# Altium PCB ESCv5.PcbDoc
Units mm, origin at the board's own origin, x right, y up, seen from the top; angles counter-clockwise.
Board outline 42.42 x 32.89 mm, 2 copper layers (Top Layer, Bottom Layer); 60 components, 40 nets, 182 pads, 0 vias.
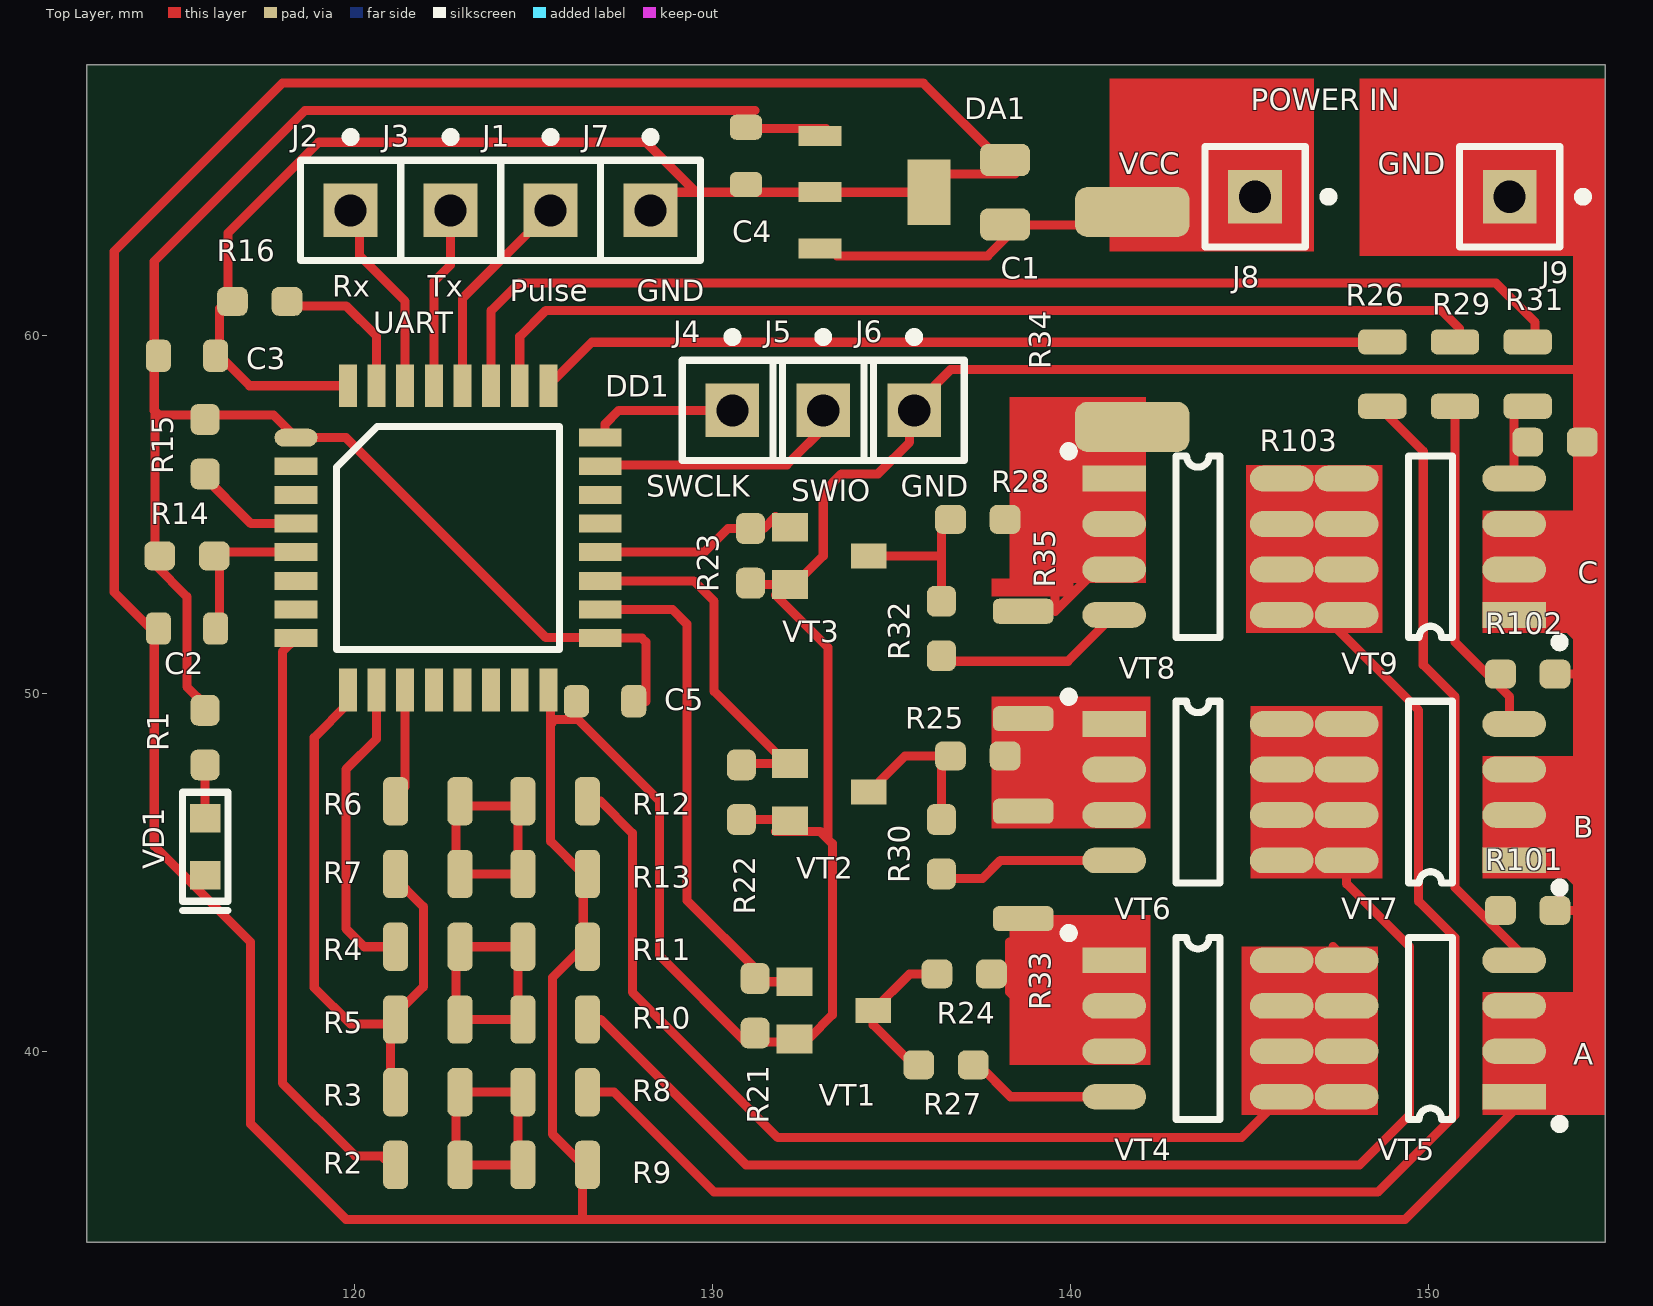
[diagram p0: Top Layer view]
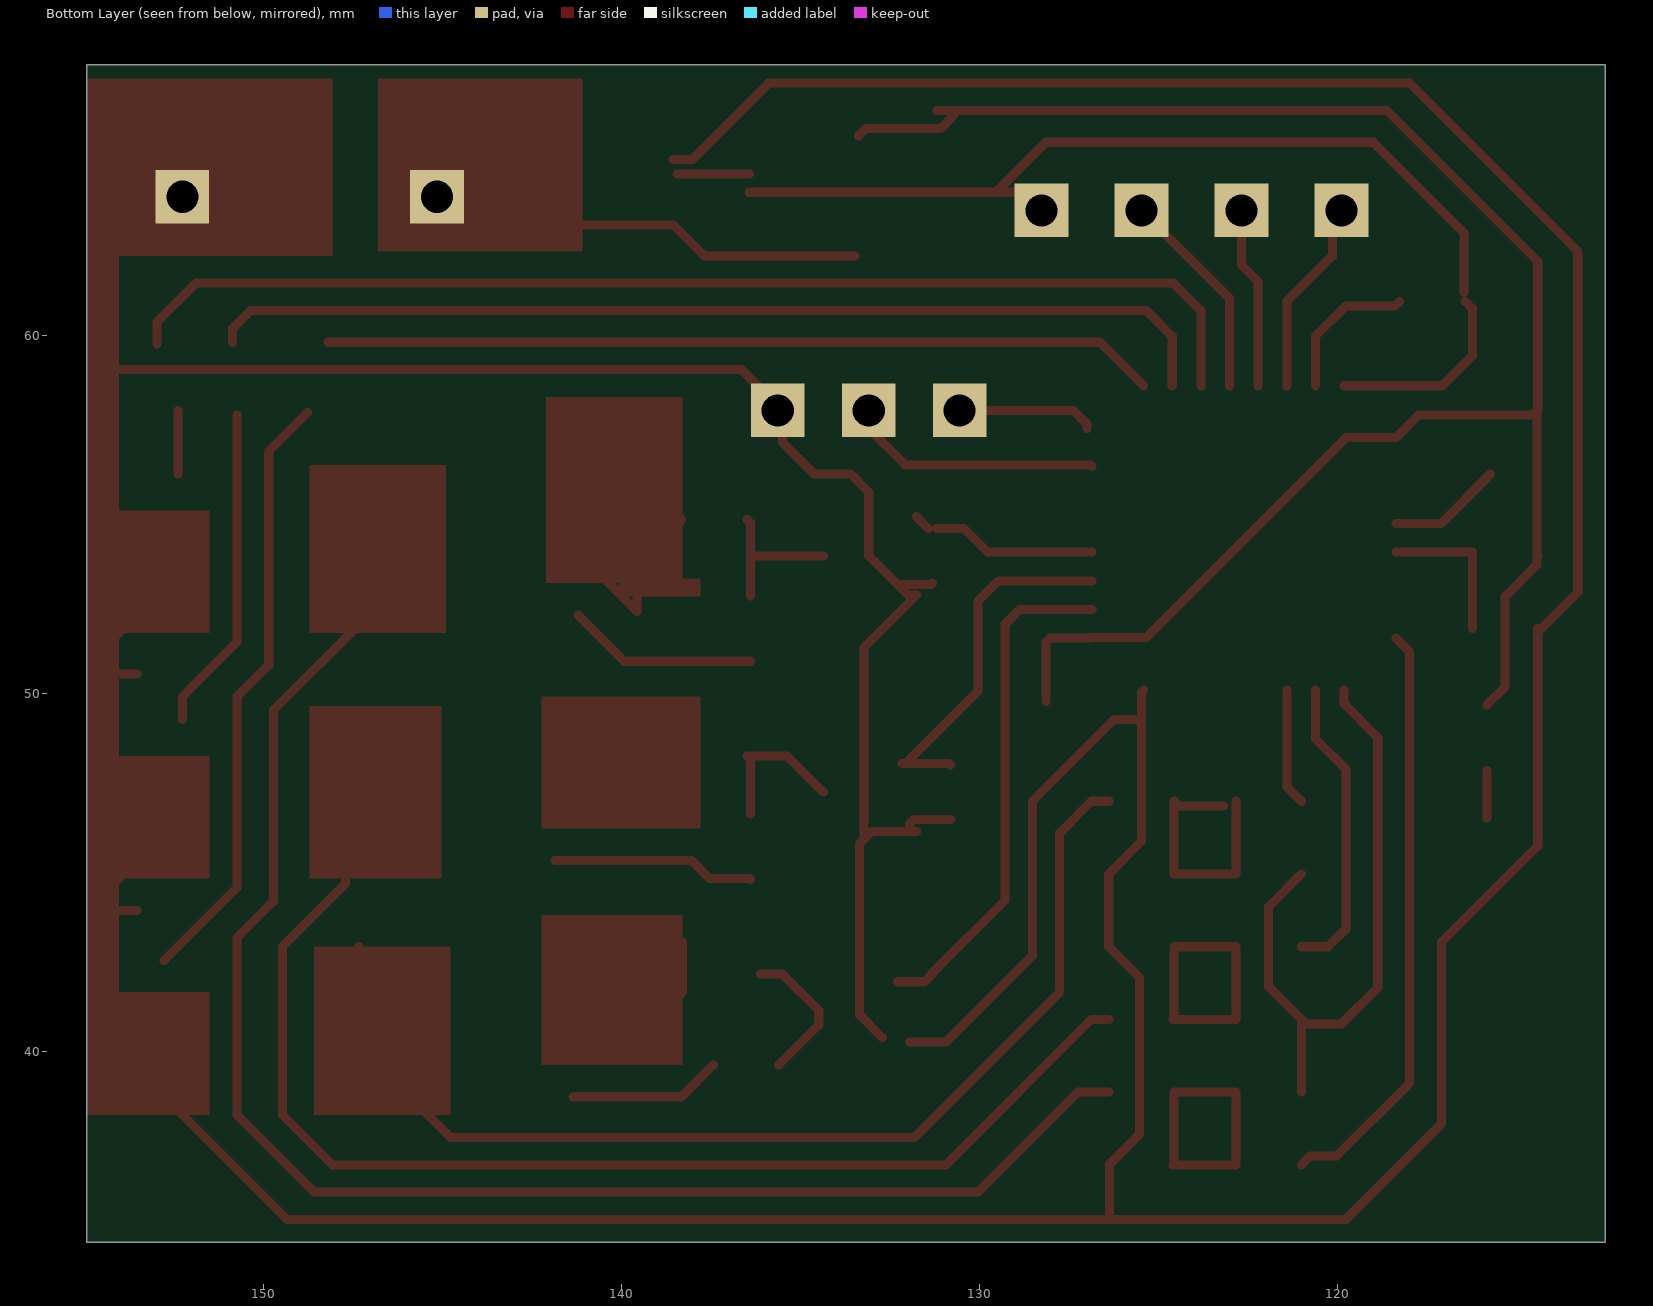
[diagram p1: Bottom Layer view, seen from below]
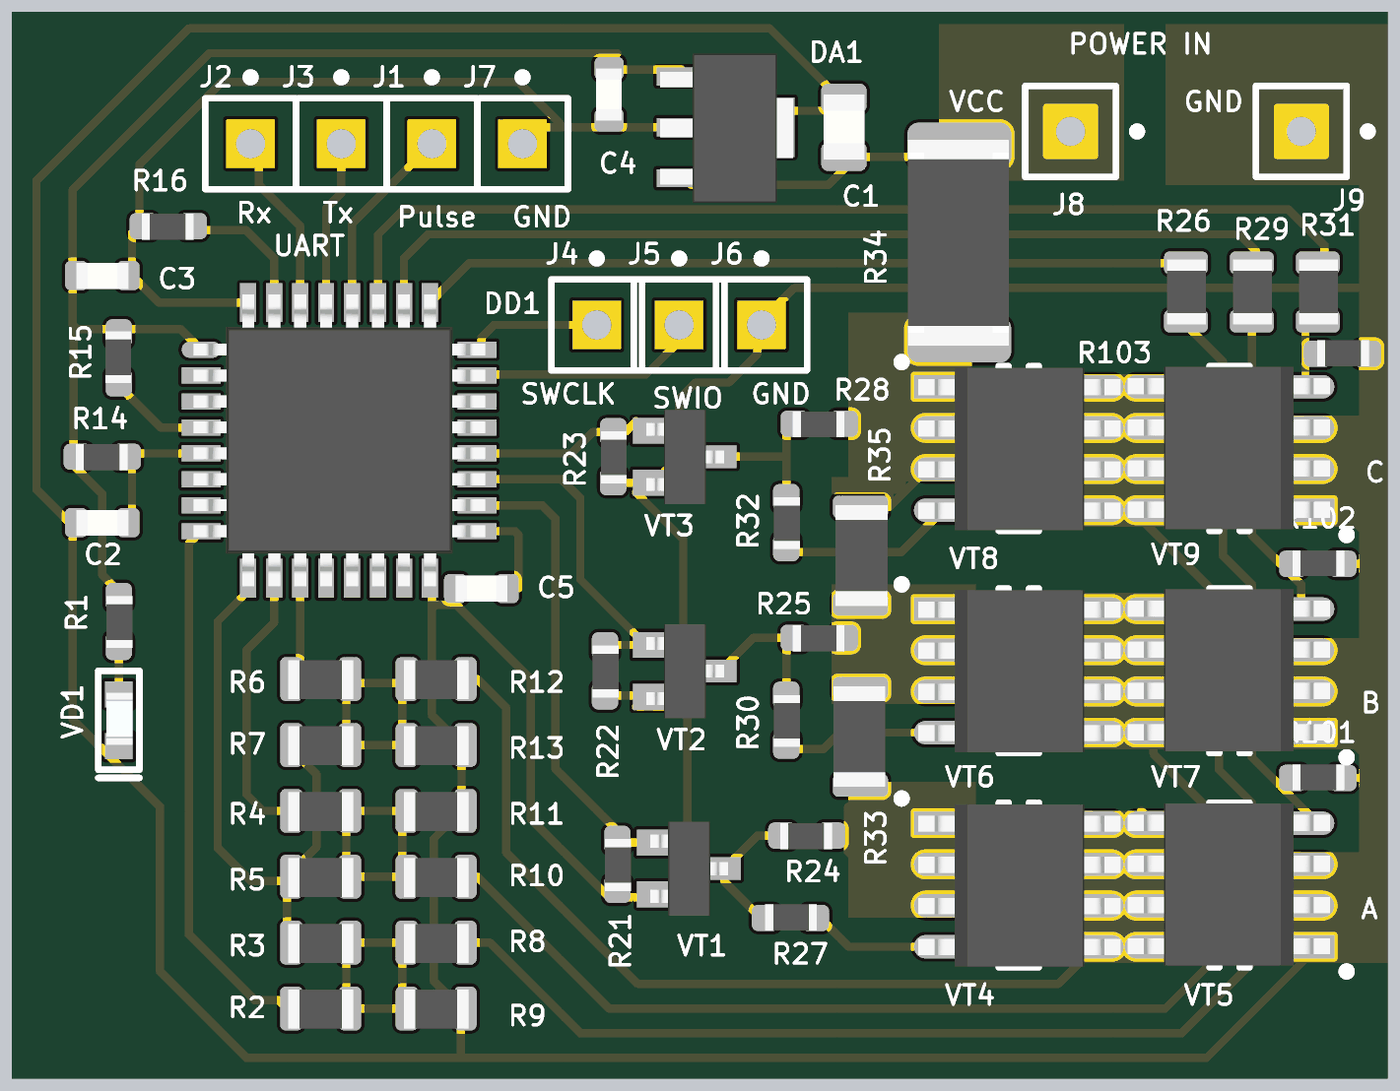
[diagram p2: 3D render of the assembled board from above, using the file's embedded part models]

## Layer stack, top to bottom
Top Solder: solder mask 0.0102, Solder Resist, Dk 3.5
Top Layer: signal copper 0.0356
Dielectric1: dielectric 0.32, FR-4, Dk 4.8
Bottom Layer: signal copper 0.0356
Bottom Solder: solder mask 0.0102, Solder Resist, Dk 3.5

## Board outline
112.522,34.671 112.522,67.564 154.94,67.564 154.94,34.671

## Design rules (kind name [scope] priority, off if disabled: settings)
Clearance [All] p1: gap=0.254
ComponentClearance [All] p1 off: gap=0.254 collisioncheckmode=3 verticalgap=0.254 showdistances=FALSE
FabricationTestPointUsage TestPointUsage [All] p1: valid=0 allowmultiple=FALSE
FabricationTestpoint Testpoint [All] p1: side=3 testpointundercomponent=TRUE minsize=1.016 maxsize=2.54 preferedsize=1.524 minholesize=0 maxholesize=1.016 preferedholesize=0.813 testpointgrid=0.025 allowsidetop=TRUE allowsidebottom=TRUE usegrid=TRUE gridtolerance=0
MinimumSolderMaskSliver [All] p1: minsoldermaskwidth=0.05
PolygonConnect [All] p1: connectstyle=Relief reliefconductorwidth=0.254 reliefentries=4 polygonreliefangle="90 Angle" airgapwidth=0.254
RoomDefinition ESC [InComponentClass('ESC')] p1: confinementstyle=ConfineIn formatcopy=TRUE lockcomponents=FALSE outline 112.395,34.671 155.067,34.671 155.067,67.564 112.395,67.564
RoutingVias [All] p1: holewidth=0.711 width=1.27 viastyle="Through Hole" minholewidth=0.711 minwidth=1.27 maxholewidth=0.711 maxwidth=1.27
SilkToSolderMaskClearance SilkscreenOverComponentPads [IsPad] p1 off: minsilkscreentomaskgap=0.254 clearancetoexposedcopper=TRUE
SolderMaskExpansion [All] p1: expansion=0.102
Width [All] p1: maxlimit=0.254 minlimit=0.254 preferedwidth=0.254
25 further rules are at their usual default settings.

## Components (designator, comment, footprint, x,y, rotation, side; value= is the part's Value field where it differs from the comment)
C1 "1uF" CAP0805 138.176,64.008 r90 top
C2 "0.1uF" CAP0603 115.316,51.816 r0 top
C3 "0.1uF" CAP0603 115.316,59.436 r0 top
C4 "0.1uF" CAP0603 130.937,65.024 r270 top
C5 "0.1uF" CAP0603 127,49.784 r0 top
DA1 "L78L33??" SOT89 133.604,64.008 r270 top
DD1 "STM32F051K8T" LQFP32-STM32 118.364,57.15 r0 top
J1 "Socket" PIN1 125.476,63.5 r0 top
J2 "Socket" PIN1 119.888,63.5 r0 top
J3 "Socket" PIN1 122.682,63.5 r0 top
J4 "Socket" PIN1 130.556,57.912 r0 top
J5 "Socket" PIN1 133.096,57.912 r0 top
J6 "Socket" PIN1 135.636,57.912 r0 top
J7 "Socket" PIN1 128.27,63.5 r0 top
J8 "Socket" PIN1 145.161,63.881 r270 top
J9 "Socket" PIN1 152.273,63.881 r270 top
R1 "1k" RES0603 115.824,48.768 r270 top
R2 "33k" RES0805 122.047,36.83 r180 top
R3 "33k" RES0805 122.047,38.862 r180 top
R4 "33k" RES0805 122.047,42.926 r180 top
R5 "33k" RES0805 122.047,40.894 r180 top
R6 "33k" RES0805 122.047,46.99 r180 top
R7 "33k" RES0805 122.047,44.958 r180 top
R8 "33k" RES0805 125.603,38.862 r180 top
R9 "12k" RES0805 125.603,36.83 r180 top
R10 "33k" RES0805 125.603,40.894 r180 top
R11 "12k" RES0805 125.603,42.926 r180 top
R12 "33k" RES0805 125.603,46.99 r180 top
R13 "12k" RES0805 125.603,44.958 r180 top
R14 "0" RES0603 115.316,53.848 r180 top
R15 "10k" RES0603 115.824,56.896 r90 top
R16 "10k" RES0603 117.348,60.96 r180 top
R21 "10k" RES0603 131.191,41.275 r270 top
R22 "10k" RES0603 130.81,47.244 r270 top
R23 "10k" RES0603 131.064,53.848 r270 top
R24 "2k" RES0603 137.033,42.164 r180 top
R25 "2k" RES0603 137.414,48.26 r180 top
R26 "100" RES0805 148.717,58.928 r270 top
R27 "100" RES0603 136.525,39.624 r0 top
R28 "2k" RES0603 137.414,54.864 r180 top
R29 "100" RES0805 150.749,58.928 r270 top
R30 "100" RES0603 136.398,45.72 r270 top
R31 "100" RES0805 152.781,58.928 r270 top
R32 "100" RES0603 136.398,51.816 r270 top
R33 "0" RES1206 138.684,45.212 r90 top
R34 "0" RES2512 141.732,60.452 r90 top
R35 "0" RES1206 138.684,50.8 r270 top
R101 "10k" RES0603 152.781,43.942 r0 top
R102 "10k" RES0603 152.781,50.546 r0 top
R103 "10k" RES0603 153.543,57.023 r0 top
VD1 "KP-1608SURC" "DIODE 1608" 115.824,45.72 r90 top
VT1 "BC817-25" SOT23 134.493,41.148 r270 top
VT2 "BC817-25" SOT23 134.366,47.244 r270 top
VT3 "BC817-25" SOT23 134.366,53.848 r270 top
VT4 "IRF9310PbF" "SO-8 IRF..." 141.224,42.545 r0 top
VT5 "IRF8736PbF" "SO-8 IRF..." 152.4,38.735 r180 top
VT6 "IRF9310PbF" "SO-8 IRF..." 141.224,49.149 r0 top
VT7 "IRF8736PbF" "SO-8 IRF..." 152.4,45.339 r180 top
VT8 "IRF9310PbF" "SO-8 IRF..." 141.224,56.007 r0 top
VT9 "IRF8736PbF" "SO-8 IRF..." 152.4,52.197 r180 top

## Footprints (in the part's own frame and the unit in brackets; to place one, negate y for a bottom-side part, rotate by r counter-clockwise, add the part's x,y. Pads: shape width x height; smd on the part's side, far side on the other; paste and mask are expansions set on the pad)
CAP0603 [mm]
  rrect50% 0.7x0.9 smd: 1(-0.8,0) 2(0.8,0)
  body extent -0.8,-0.41 0.8,0.39, height 0.9
CAP0805 [mm]
  rrect50% 0.9x1.4 smd: 1(-0.9,0) 2(0.9,0)
  body extent -0.99,-0.63 1.01,0.62, height 1.3
"DIODE 1608" [mm]
  rect 0.8x0.85 smd: 1(-0.8,0) 2(0.8,0)
  silkscreen extent -1.78,-0.64 1.52,0.64, body extent -0.77,-0.42 0.85,0.38, height 1.1
LQFP32-STM32 [mm] "STM32L052"
  oval 1.2x0.5 smd: 1(0,0)
  rect 1.2x0.5 smd: 2(0,-0.8) 3(0,-1.6) 4(0,-2.4) 5(0,-3.2) 6(0,-4) 7(0,-4.8) 8(0,-5.6) 17(8.5,-5.6) 18(8.5,-4.8) 19(8.5,-4) 20(8.5,-3.2) 21(8.5,-2.4) 22(8.5,-1.6) 23(8.5,-0.8) 24(8.5,0)
  rect 0.5x1.2 smd: 9(1.45,-7.05) 10(2.25,-7.05) 11(3.05,-7.05) 12(3.85,-7.05) 13(4.65,-7.05) 14(5.45,-7.05) 15(6.25,-7.05) 16(7.05,-7.05) 25(7.05,1.45) 26(6.25,1.45) 27(5.45,1.45) 28(4.65,1.45) 29(3.85,1.45) 30(3.05,1.45) 31(2.25,1.45) 32(1.45,1.45)
  silkscreen extent 1.13,-5.92 7.37,0.32, body extent -0.24,-7.3 8.76,1.7, height 1.6
PIN1 [mm] "Connector; Plug"
  rect 1.5x1.5 hole 0.9: 1(0,0)
  silkscreen extent -1.4,-1.4 1.4,2.17
RES0603 [mm]
  rrect50% 0.86x0.81 smd: 1(-0.762,0) 2(0.762,0)
  body extent -0.78,-0.38 0.82,0.42, height 0.45
RES0805 [mm]
  rrect50% 0.7x1.35 smd: 1(-0.9,0) 2(0.9,0)
  body extent -1,-0.58 1,0.62, height 0.5
RES1206 [mm]
  rrect50% 0.7x1.7 smd: 1(-1.5,0) 2(1.5,0)
  body extent -1.55,-0.76 1.55,0.84, height 0.55
RES2512 [mm]
  rrect50% 1.4x3.2 smd: 1(-3,0) 2(3,0)
  body extent -3.17,-1.52 3.18,1.58, height 0.55
"SO-8 IRF..." [mm]
  rect 1.78x0.72 smd: 1(0,0)
  oval 1.78x0.72 smd: 2(0,-1.27) 3(0,-2.54) 4(0,-3.81) 5(4.68,-3.81) 6(4.68,-2.54) 7(4.68,-1.27) 8(4.68,0)
  silkscreen extent -1.4,-4.44 2.96,0.89, body extent -0.75,-4.42 5.48,0.58, height 1.75
SOT23 [mm]
  rect 0.8x1 smd: 1(-0.8,-2.2) 2(0.8,-2.2)
  rect 0.7x1 smd: 3(0,0)
  body extent -1.44,-2.29 1.46,0.11, height 1.02
SOT89 [mm]
  rect 0.56x1.2 smd: 1(-1.57,-0.6) 2(0,-0.6) 3(1.57,-0.6)
  rect 1.83x1.2 smd: 2(0,2.45)
  body extent -2.27,-1.09 2.33,3.01, height 1.6

## Part data
C1 C2 C3 C4 C5: library part Capacitor
DA1: library part DA-L78L05, "LDO"
DD1: "LQFP32"
R1 R2 R3 R4 R5 R6 R7 R8 R9 R10 R11 R12 R13 R14 R15 R16 R21 R22 R23 R24 R25 R26 R27 R28 R29 R30 R31 R32 R33 R34 R35 R101 R102 R103: library part Resistor
VD1: library part LED_0603
VT1 VT2 VT3: library part "VT - BC817", "NPN"
VT4 VT6 VT8: "P-MOSFET -20A"
VT5 VT7 VT9: "N-MOSFET 18A"

## Nets (pads, with @x,y where several pads share a name; then routed paths per layer and width w, separated by ;. In a path a pad name is that pad's centre, name@x,y a point inside that pad or via, vN(x,y) a via of type N, cw(c..) or ccw(c..) an arc to the next point about the centre after c; other vN are vias at no path point)
3V3: C3.1 C4.1 C5.2 DA1.1 DD1.1 DD1.17 R1.1 R14.2 R15.2 | length 52.5
  Top Layer w0.254: R14.2@114.402,53.848 R14.2@114.427,53.848 ; R1.1@115.824,49.682 115.316,50.19 115.316,52.705 114.427,53.594 R14.2@114.427,53.848 ; C5.2@128.143,49.784 128.143,51.435 128.028,51.55 DD1.17 126.852,51.562 125.349,51.562 119.761,57.15 DD1.1 117.729,57.785 114.529,57.785 114.427,57.887 ; C4.1@130.708,66.167 131.089,65.786 133.177,65.786 DA1.1@133.385,65.578 ; 131.191,66.294 118.618,66.294 114.402,62.078 114.402,57.912 114.427,57.887 ; R14.2@114.427,53.848 114.427,57.887
ADC_0: DD1.9 R3.2 R5.2 R7.2 | length 18.2
  Top Layer w0.254: DD1.9 119.814,49.71 118.872,48.768 118.872,41.783 119.888,40.767 120.879,40.767 R5.2@121.006,40.894 ; R3.2@121.006,38.862 R5.2@121.006,40.894 ; R7.2@121.006,44.958 121.92,44.044 121.92,41.808 R5.2@121.006,40.894
ADC_1: DD1.11 R6.2 | length 3.3
  Top Layer w0.254: R6.2@121.006,46.99 121.414,47.398 DD1.11
ADC_2: DD1.10 R4.2 | length 8.5
  Top Layer w0.254: DD1.10 120.614,48.732 119.761,47.879 119.761,43.434 120.269,42.926 R4.2@121.006,42.926
ADC_3: DD1.8 R2.2 | length 16.6
  Top Layer w0.254: DD1.8 117.983,51.169 117.983,39.116 120.015,37.084 120.752,37.084 R2.2@121.006,36.83
GND: C1.2 C2.1 C3.2 C4.2 C5.1 DA1.2 DD1.16 DD1.32 J6.1 J7.1 J9.1 R9.1 R11.1 R13.1 R16.2 R21.2 R22.2 R23.2 R101.2 R102.2 R103.2 VD1.1 VT1.2 VT2.2 VT3.2 VT5.1 VT5.2 VT5.3 VT7.1 VT7.2 VT7.3 VT9.1 VT9.2 VT9.3 | length 234.1
  Top Layer w0.254: R16.2@116.434,60.96 116.23,60.757 116.23,59.436 117.066,58.6 DD1.32 ; R16.2@116.459,61.214 116.459,62.865 118.999,65.405 128.143,65.405 129.54,64.008 ; DD1.16 125.476,50.038 125.476,49.149 ; 126.365,35.458 126.365,36.855 125.527,37.694 125.527,42.062 126.39,42.926 126.39,44.958 125.476,45.872 125.476,49.149 ; J7.1 128.778,64.008 129.54,64.008 ; R22.2 131.826,46.482 VT2.2@131.953,46.355 ; R23.2@131.318,53.086 131.356,53.048 VT3.2 ; VT2.2@131.766,46.144 133.012,46.144 133.35,45.806 133.35,41.021 VT1.2@132.715,40.386 ; VT1.2@131.953,40.259 130.937,40.259 128.524,42.672 128.524,46.99 126.238,49.276 125.603,49.276 125.476,49.149 ; 133.223,45.974 133.223,51.291 131.766,52.748 131.996,52.748 133.096,53.848 133.096,55.626 133.604,56.134 134.62,56.134 135.509,57.023 135.509,57.912 136.652,59.055 154.178,59.055 154.178,64.262 154.051,64.389 154.051,65.278 153.289,66.04 151.003,66.04 ; DA1.2@136.435,64.008 133.004,64.008 129.54,64.008 ; DA1.2@136.435,64.516 C1.2@138.455,64.516 ; C1.2@138.557,64.922 138.024,64.922 135.89,67.056 117.983,67.056 113.284,62.357 113.284,52.832 114.3,51.816 114.402,51.816 114.402,45.745 117.094,43.053 117.094,37.973 119.761,35.306 149.352,35.306 152.4,38.354 VT5.1 ; VT5.3 VT5.2 VT5.1 ; VT7.3 VT7.2 VT7.1 153.543,45.339 154.178,44.704 154.178,43.942 ; VT9.3 VT9.2 VT9.1 153.543,52.197 154.178,51.562 ; R101.2 154.178,43.942 ; R102.2 154.178,50.546 ; 154.178,58.42 154.178,51.562 ; 154.432,43.942 154.178,43.942 ; 154.432,50.546 154.178,50.546 ; VT5.1 154.178,40.513 154.178,43.942 ; 154.178,50.546 154.178,51.562
NetC2_2: C2.2 DD1.5 R14.1 | length 4.2
  Top Layer w0.254: C2.2@116.23,51.816 R14.1@116.23,53.848 ; R14.1@116.23,53.95 DD1.5
NetDD1_4: DD1.4 R15.1 | length 3.2
  Top Layer w0.254: R15.1@115.722,56.134 117.106,54.75 DD1.4
NetDD1_28: DD1.28 J1.1 | length 5.9
  Top Layer w0.254: DD1.28 123.014,61.038 J1.1
NetDD1_31: DD1.31 R16.1 | length 4.1
  Top Layer w0.254: R16.1@118.262,60.96 118.389,60.833 119.761,60.833 120.614,59.98 DD1.31
NetR1_2: R1.2 VD1.2 | length 1.3
  Top Layer w0.254: VD1.2 R1.2@115.824,47.854
NetR2_1: R2.1 R3.1 R8.2 R9.2 | length 7.5
  Top Layer w0.254: R9.2@124.587,36.83 R9.2@124.562,36.83 ; R9.2@124.562,36.83 122.834,36.83 122.834,38.862 124.562,38.862 R9.2@124.562,36.83
NetR4_1: R4.1 R5.1 R10.2 R11.2 | length 7.5
  Top Layer w0.254: R10.2@124.587,40.894 R10.2@124.562,40.894 ; R10.2@124.562,40.894 122.834,40.894 122.834,42.926 124.562,42.926 R10.2@124.562,40.894
NetR6_1: R6.1 R7.1 R12.2 R13.2 | length 7.2
  Top Layer w0.254: R6.1@122.834,46.99 122.834,44.958 124.562,44.958 124.562,46.99 124.435,46.863 R6.1@123.19,46.863
NetR24_2: R24.2 R27.1 VT1.3 | length 4
  Top Layer w0.254: R27.1@135.611,39.624 134.493,40.742 VT1.3 135.509,42.164 R24.2@136.119,42.164
NetR25_2: R25.2 R30.1 VT2.3 | length 4.2
  Top Layer w0.254: VT2.3 135.382,48.26 136.5,48.26 136.398,48.158 R30.1@136.398,46.634
NetR26_2: R26.2 R101.1 VT5.4 | length 17
  Top Layer w0.254: R26.2@148.78,57.848 149.86,56.769 149.86,50.8 150.749,49.911 150.749,44.577 VT5.4@152.781,42.545
NetR27_2: R27.2 VT4.4 | length 4.3
  Top Layer w0.254: R27.2@137.439,39.624 138.328,38.735 VT4.4@141.351,38.735
NetR28_2: R28.2 R32.1 VT3.3 | length 4.2
  Top Layer w0.254: VT3.3 136.398,53.848 ; R32.1@136.398,52.73 136.398,53.848 ; R28.2@136.5,54.864 136.398,54.762 136.398,53.848
NetR29_2: R29.2 R102.1 VT7.4 | length 9.1
  Top Layer w0.254: R29.2@150.749,57.785 150.749,51.435 152.273,49.911 VT7.4@152.273,49.276
NetR30_2: R30.2 VT6.4 | length 5.7
  Top Layer w0.254: R30.2@136.398,44.806 136.423,44.831 137.541,44.831 138.049,45.339 VT6.4@141.859,45.339
NetR31_2: R31.2 R103.1 VT9.4 | length 1.8
  Top Layer w0.254: VT9.4@152.4,56.134 R31.2@152.4,57.912
NetR32_2: R32.2 VT8.4 | length 5.4
  Top Layer w0.254: R32.2@136.398,50.902 139.929,50.902 VT8.4
OUT_A0: DD1.25 R26.1 | length 23.3
  Top Layer w0.254: DD1.25 126.631,59.817 R26.1@148.209,59.817
OUT_A1: DD1.18 R21.1 VT1.1 | length 14.3
  Top Layer w0.254: DD1.18 128.879,52.35 129.286,51.943 129.286,44.221 R21.1@131.343,42.164 ; R21.1@131.318,42.164 131.534,41.948 VT1.1
OUT_B0: DD1.26 R29.1 | length 28.5
  Top Layer w0.254: DD1.26 124.614,59.971 125.349,60.706 150.368,60.706 150.876,60.198 R29.1@150.876,59.817
OUT_B1: DD1.19 R22.1 VT2.1 | length 10
  Top Layer w0.254: DD1.19 129.476,53.15 130.048,52.578 130.048,50.063 VT2.1@131.953,48.158 ; R22.1 130.848,48.044 VT2.1
OUT_C0: DD1.27 R31.1 | length 32.6
  Top Layer w0.254: DD1.27 123.814,60.695 124.587,61.468 151.892,61.468 152.984,60.376 R31.1@152.984,59.766
OUT_C1: DD1.20 R23.1 VT3.1 | length 5.1
  Top Layer w0.254: DD1.20 129.769,53.95 130.429,54.61 R23.1@131.191,54.61 ; R23.1@131.428,54.61 VT3.1@131.766,54.948
POINT_A: R12.1 VT4.5 VT4.6 VT4.7 VT4.8 VT5.5 VT5.6 VT5.7 VT5.8 | length 39.3
  Top Layer w0.254: R12.1@126.39,46.99 126.873,46.99 127.762,46.101 127.762,41.656 131.826,37.592 144.78,37.592 145.796,38.608 VT4.5@145.796,38.735 ; VT4.8 VT4.7 VT4.6 VT4.5 146.031,38.608 147.955,38.608 VT5.8@148.082,38.481 ; VT4.8@145.923,42.672 VT5.5@148.355,42.672 ; 147.339,42.926 VT5.5 VT5.8
POINT_B: R10.1 VT6.5 VT6.6 VT6.7 VT6.8 VT7.5 VT7.6 VT7.7 VT7.8 | length 44.8
  Top Layer w0.254: R10.1@126.39,40.894 126.873,40.894 130.937,36.83 148.082,36.83 149.479,38.227 149.479,42.926 147.72,44.685 VT7.8 VT7.7 VT7.6 VT7.5 VT7.5@147.593,49.276 ; VT6.8 VT6.7 VT6.6 VT6.5 146.158,45.085 VT7.8@147.955,45.085 ; VT6.8@146.05,49.022 VT7.5@147.701,49.022
POINT_C: R8.1 VT8.5 VT8.6 VT8.7 VT8.8 VT9.5 VT9.6 VT9.7 VT9.8 | length 52.8
  Top Layer w0.254: R8.1@126.39,38.862 127.254,38.862 130.048,36.068 148.59,36.068 150.749,38.227 150.749,43.18 149.733,44.196 149.733,49.53 147.193,52.07 146.031,52.07 VT8.5 VT8.6 VT8.7 VT8.8 ; VT8.8@146.05,56.134 146.431,55.753 VT9.5@147.955,55.753 ; VT9.8 VT9.7 VT9.6 VT9.5
SYS_SWCLK: DD1.24 J4.1 | length 3.8
  Top Layer w0.254: 127,57.404 127,57.531 127.381,57.912 J4.1
SYS_SWDIO: DD1.23 J5.1 | length 6.8
  Top Layer w0.254: DD1.23 126.902,56.388 132.08,56.388 J5.1@133.223,57.531
UART_RX: DD1.30 J2.1 | length 5.4
  Top Layer w0.254: J2.1@120.142,63.5 120.142,62.23 121.414,60.958 DD1.30
UART_TX: DD1.29 J3.1 | length 5.1
  Top Layer w0.254: DD1.29 122.214,61.508 122.682,61.976 J3.1
VCC1: R28.1 R34.1 R35.1 VT8.1 VT8.2 VT8.3 | length 14.7
  Top Layer w0.254: R34.1@140.609,57.78 141.986,57.78 141.732,57.526 VT8.1@141.732,56.007 ; VT8.3@140.741,53.467 139.573,52.299 139.573,53.619 138.328,54.864 R34.1@141.244,57.78 ; VT8.3 VT8.2 VT8.1
VCC2: R25.1 R33.2 R35.2 VT6.1 VT6.2 VT6.3 | length 9.7
  Top Layer w0.254: R25.1@138.328,48.26 138.532,48.26 139.573,49.301 139.573,46.736 ; R35.2@139.065,49.301 139.344,49.022 VT6.1@141.732,49.022 ; VT6.1@141.097,49.022 VT6.1 VT6.2 VT6.3
VCC3: R24.1 R33.1 VT4.1 VT4.2 VT4.3 | length 8.2
  Top Layer w0.254: 138.303,43.053 138.303,41.656 139.954,40.005 VT4.3@141.859,40.005 ; VT4.3 VT4.2 VT4.1
VCC_POWER: C1.1 DA1.3 J8.1 R34.2 | length 9.9
  Top Layer w0.254: DA1.3@133.477,62.23 137.693,62.23 138.557,63.094 141.575,63.094 R34.2@142.621,64.14
pads on no net: DD1.2 DD1.3 DD1.6 DD1.7 DD1.12 DD1.13 DD1.14 DD1.15 DD1.21 DD1.22

## Other copper
Top Layer:
  rectangle net VCC_POWER: 141.097,62.357 146.812,67.183
  rectangle net GND: 148.082,62.23 154.305,67.183
  rectangle net VCC1: 138.303,53.086 142.113,58.293
  rectangle net VCC2: 137.795,46.228 142.24,49.911
  rectangle net VCC3: 138.303,39.624 142.24,43.815
  rectangle net POINT_A: 144.78,38.227 148.59,42.926
  rectangle net POINT_B: 145.034,44.831 148.717,49.657
  rectangle net POINT_C: 144.907,51.689 148.717,56.388
  rectangle net VCC1: 137.795,52.705 140.081,53.213
  rectangle net GND: 151.511,38.227 154.94,41.656
  rectangle net GND: 151.511,44.831 154.94,48.26
  rectangle net GND: 151.511,51.689 154.94,55.118
  rectangle net GND: 154.051,38.227 154.94,67.183

## Silkscreen, mask and mechanical layers (free items; w line width, h text height)
Top Overlay:
  text "POWER IN" at 145.034,66.294 h0.6
  text "VCC" at 141.351,64.516 h0.6
  text "GND" at 148.59,64.516 h0.6
  text "Rx" at 119.38,61.087 h0.6
  text "Tx" at 122.047,61.087 h0.6
  text "Pulse" at 124.333,60.96 h0.6
  text "GND" at 127.889,60.96 h0.6
  text "UART" at 120.523,60.071 h0.6
  text "SWCLK" at 128.143,55.499 h0.6
  text "GND" at 135.255,55.499 h0.6
  text "SWIO" at 132.207,55.372 h0.6
  text "C" at 154.178,53.086 h0.6
  text "B" at 154.051,45.974 h0.6
  text "A" at 154.051,39.624 h0.6
Mechanical 2:
  the board outline again, w0.254